# Altium PCB PCB1.PcbDoc
Units mil, origin at the board's own origin, x right, y up, seen from the top; angles counter-clockwise.
Board outline 1580 x 650 mil, 2 copper layers (Top Layer, Bottom Layer); 9 components, 3 nets, 33 pads, 0 vias.
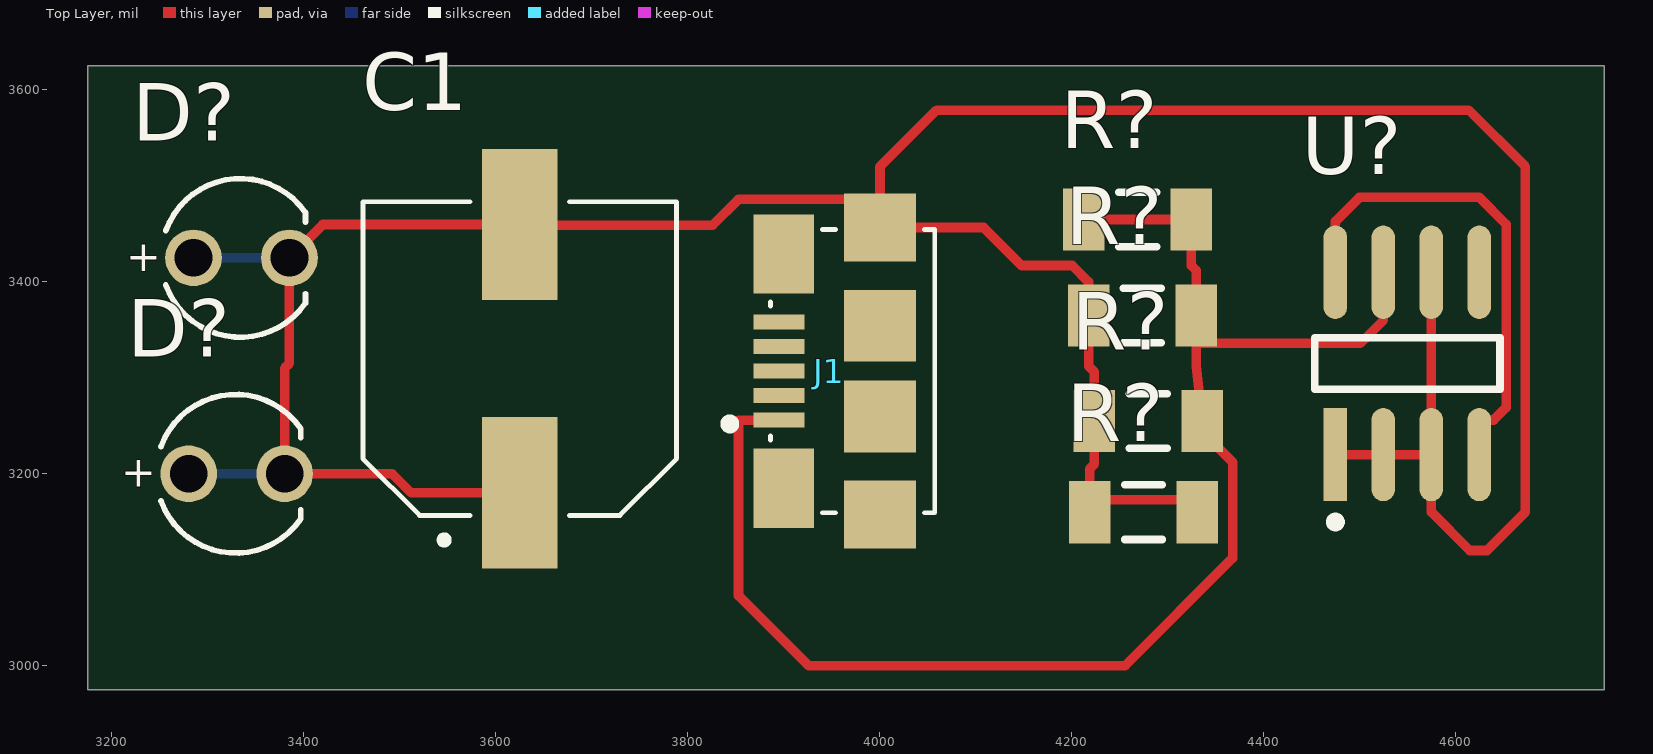
[diagram p0: Top Layer view]
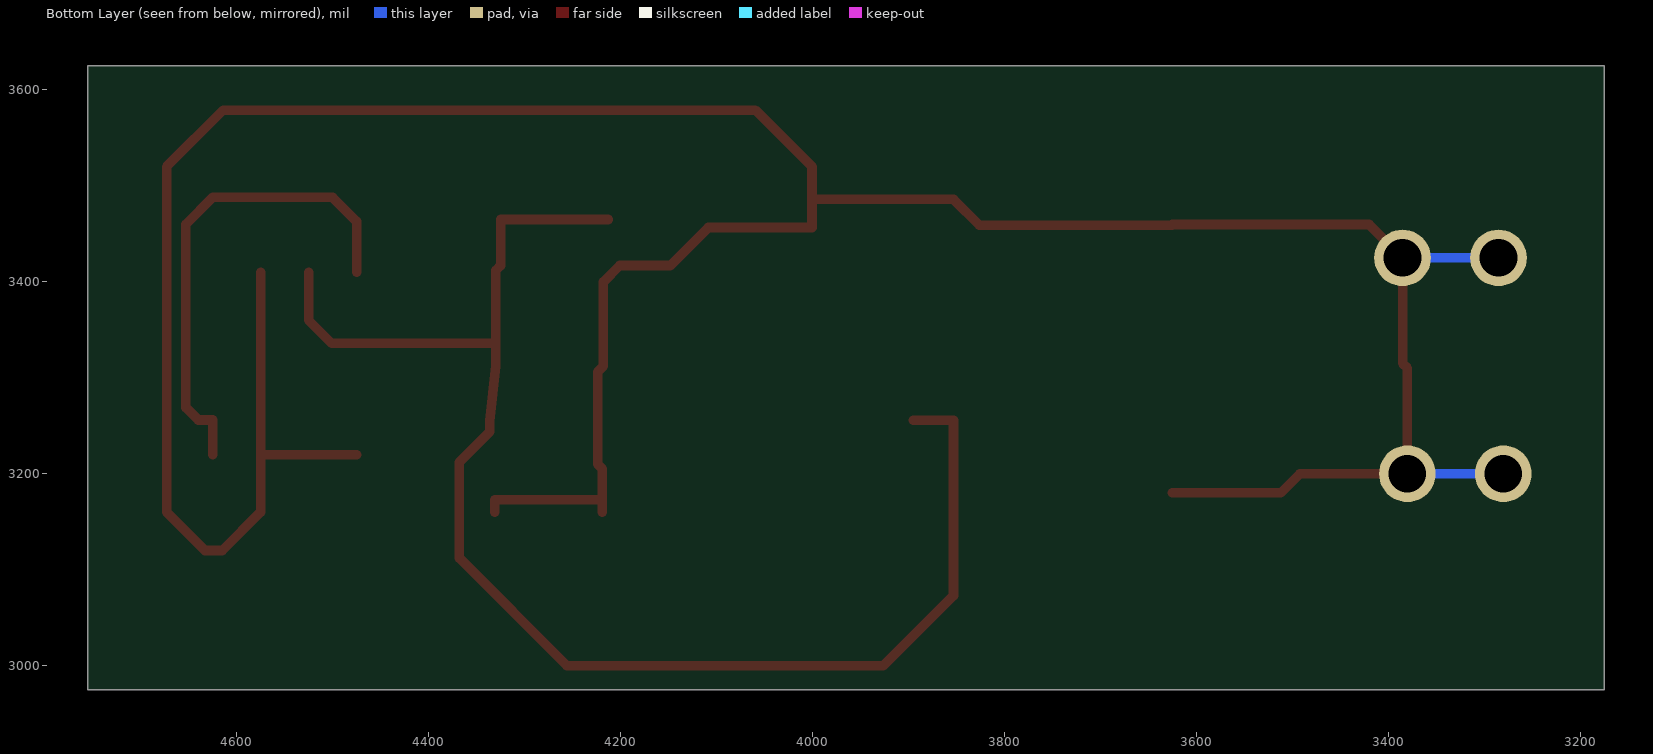
[diagram p1: Bottom Layer view, seen from below]
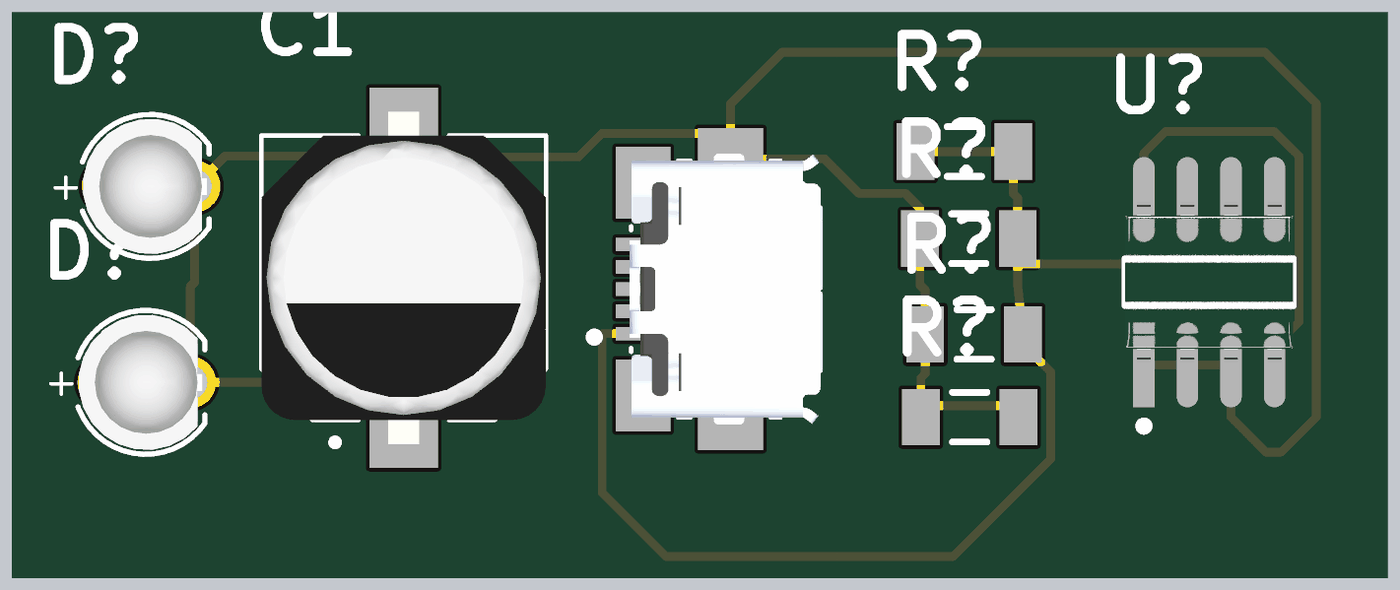
[diagram p2: 3D render of the assembled board from above, using the file's embedded part models]

## Layer stack, top to bottom
Top Solder: solder mask 0.4, Solder Resist, Dk 3.5
Top Layer: signal copper 1.4
Dielectric 1: dielectric 12.6, FR-4, Dk 4.8
Bottom Layer: signal copper 1.4
Bottom Solder: solder mask 0.4, Solder Resist, Dk 3.5

## Board outline
3175,2975 4755,2975 4755,3625 3175,3625

## Design rules (kind name [scope] priority, off if disabled: settings)
Clearance [All] p1: gap=10 ignorepadtopadclearanceinfootprint=FALSE
PolygonConnect [All] p1: connectstyle=Relief reliefconductorwidth=10 reliefentries=4 polygonreliefangle="90 Angle" airgapwidth=10
RoutingVias [All] p1: holewidth=28 width=50 viastyle="Through Hole" minholewidth=28 minwidth=50 maxholewidth=28 maxwidth=50
SolderMaskExpansion [All] p1: expansion=4 istentingtop=FALSE
SupplyNets "Schematic Supply Nets_1" [InNet('GND')] p1: voltage=0.000
SupplyNets "Schematic Supply Nets" [InNet('+5')] p2: voltage=0.000
Width [All] p1: maxlimit=10 minlimit=10 preferedwidth=10
30 further rules are at their usual default settings.

## Components (designator, comment, footprint, x,y, rotation, side; value= is the part's Value field where it differs from the comment)
C1 "EEEHA2A100P" CAP_EEEHA2A100P 3625,3320 r90 top
D? "Super Red, 2V, 40°" WL-TMRC_D3.95H5.3 3335,3425 r0 top
D? "Super Red, 2V, 40°" WL-TMRC_D3.95H5.3 3330,3200 r0 top
J1 "10118192-0001LF" AMPHENOL_10118192-0001LF 3895.08,3307.05 r90 top
R? "ERJ-8GEY0R00V" RESC3216X70X50NL05T20 4268.9,3465 r0 top
R? "ERJ-8GEY0R00V" RESC3216X70X50NL05T20 4275,3160 r0 top
R? "ERJ-8GEY0R00V" RESC3216X70X50NL05T20 4280,3255 r0 top
R? "ERJ-8GEY0R00V" RESC3216X70X50NL05T20 4273.9,3365 r0 top
U? "NE555DRG4" FP-D0008A-IPC_A 4550,3315 r90 top

## Footprints (in the part's own frame and the unit in brackets; to place one, negate y for a bottom-side part, rotate by r counter-clockwise, add the part's x,y. Pads: shape width x height; smd on the part's side, far side on the other; paste and mask are expansions set on the pad)
AMPHENOL_10118192-0001LF [mm]
  rect 0.4x1.35 smd: 1(-1.3,0) 2(-0.65,0) 3(0,0) 4(0.65,0) 5(1.3,0)
  rect 2.1x1.6 smd: SH1(-3.1,-0.125) SH2(3.1,-0.125)
  rect 1.8x1.9 smd: SH3(-3.8,-2.675) SH6(3.8,-2.675)
  rect 1.9x1.9 smd: SH4(-1.2,-2.675) SH5(1.2,-2.675)
  silkscreen extent -3.75,-4.12 3.75,1.4, body extent -3.96,-5.4 3.96,0.27, height 2.5
CAP_EEEHA2A100P [mm]
  rect 4x2 smd: 1(-3.55,0) 2(3.55,0)
  silkscreen extent -4.9,-4.15 4.15,4.15, body extent -4.85,-4.15 4.85,4.15, height 10.2
FP-D0008A-IPC_A [mil]
  rect 97.21x24.49 smd paste+0 mask+0: 1(-95.02,75)
  rrect100% 97.21x24.49 smd paste+0 mask+0: 2(-95.02,25) 3(-95.02,-25) 4(-95.02,-75) 5(95.02,-75) 6(95.02,-25) 7(95.02,25) 8(95.02,75)
  silkscreen extent -170,-97 27,97, body extent -163,-116 163,116, height 10
RESC3216X70X50NL05T20 [mm] "Chip Resistor, 2-Leads, Body 3.20x1.60mm, IPC Medium Density"
  rect 1.1x1.65 smd: 1(-1.425,0) 2(1.425,0)
  silkscreen extent -0.5,-0.73 0.5,0.73, body extent -1.63,-0.82 1.62,0.82, height 0.7
WL-TMRC_D3.95H5.3 [mm] "THT Mono-color Round Color LED, 2-leads"
  round 1.5 hole 1: 1(-1.27,0) 2(1.27,0)
  silkscreen extent -2,-2.1 1.69,2.1, body extent -1.99,-1.97 1.63,1.97, height 5.35

## Part data
C1: "10ÂµF 100V Aluminum Electrolytic Capacitors Radial, Can - SMD 1000 Hrs @ 105Â°C", Package="RADIAL-2 Panasonic", Availability="In Stock", Check_prices=https://www.snapeda.com/parts/EEE-HA2A100P/Panasonic+Electronic+Components/view-part/?ref=eda, MF="Panasonic Electronic", MP=EEE-HA2A100P, Price=None, Purchase-URL=https://pricing.snapeda.com/search/part/EEE-HA2A100P/?ref=eda, SnapEDA_Link=https://www.snapeda.com/parts/EEE-HA2A100P/Panasonic+Electronic+Components/view-part/?ref=snap
D? D?: library part 151031SS04000, "WL-TMRC Mono-color Round Color, THT, D3.95 x H5.3mm, Super Red, 2V, 40°", Case/Size Code=3mm, Emitting Color="Super Red", Forward Voltage=2V, Manufacturer="Wurth Elektronik", Operating Temperature Max=85°C, Operating Temperature Min=-40°C, Category="Signal LEDs", Chip Technology=AlInGaP, ComponentLink1Description="Website Link", ComponentLink1URL=https://www.we-online.com/redexpert/article/151031SS04000?ad, ComponentLink2Description="Datasheet Link", ComponentLink2URL=https://www.we-online.com/redexpert/spec/151031SS04000?ad, Diameter=3.95mm, Dominant Wavelength=635nm, Height=5.3mm, Luminous Intensity=160mcd, Manufacturer Part Number=151031SS04000, Match Code=WL-TMRC, Mount="Through Hole", Packaging=Bulk, Peak Wavelength=640nm, Viewing Angle=40°
J1: "Micro USB, Input Output Connectors, B TYPE RECEPTACLE with flange", Package=None, Availability="In Stock", Check_prices=https://www.snapeda.com/parts/10118192-0001LF/Amphenol+FCI/view-part/?ref=eda, MF="Amphenol ICC", MP=10118192-0001LF, Price=None, Purchase-URL=https://pricing.snapeda.com/search/part/10118192-0001LF/?ref=eda, SnapEDA_Link=https://www.snapeda.com/parts/10118192-0001LF/Amphenol+FCI/view-part/?ref=snap
R? R? R? R?: library part CMP-2003-00541-1, Manufacturer=Panasonic, Part Number=ERJ-8GEY0R00V
U?: library part CMP-04858-000027-1, "IC OSC SGL TIMER 100KHZ 8-SOIC", Case/Package=SOIC, Frequency=100kHz, High Level Output Current=-200mA, Low Level Output Current=200mA, Max Operating Temperature=70°C, Max Supply Voltage=16V, Min Operating Temperature=0°C, Min Supply Voltage=4.5V, Nominal Supply Current=2mA, Operating Supply Current=10mA, Package Quantity=2500, Quiescent Current=15mA, Height=1.58mm, Lead Free="Lead Free", Length=4.9mm, Mount="Surface Mount", Number of Pins=8, Number of Timers/Counters=1, Packaging="Tape and Reel", Radiation Hardening=No, RoHS Compliant=Yes, Series=-, Supply Current=2mA, Weight=0.002561oz, Width=3.91mm

## Nets (pads, with @x,y where several pads share a name; then routed paths per layer and width w, separated by ;. In a path a pad name is that pad's centre, name@x,y a point inside that pad or via, vN(x,y) a via of type N, cw(c..) or ccw(c..) an arc to the next point about the centre after c; other vN are vias at no path point)
+5: J1.1 R?.1@4212.8,3465 R?.2@4325,3465 R?.2@4330,3365 R?.2@4336.1,3255 U?.7 | length 1552.4
  Top Layer w10: J1.1 3853,3255.87 3853,3073 3926,3000 4256,3000 4368,3112 4368,3212.1 4336.1,3244 4336.1,3255 4330,3312.1 R?.2@4330,3336 ; R?.1@4212.8,3465 4325,3465 4325,3417 4330,3412 4330,3365 R?.2@4330,3336 ; U?.7 4525,3360 4501,3336 R?.2@4330,3336
GND: C1.1 C1.2 D?.1 D?.2 J1.SH6 R?.1@4217.8,3365 R?.1@4218.9,3160 R?.1@4223.9,3255 R?.2@4331.1,3160 U?.1 U?.2 U?.3 U?.6 | length 3558.7
  Top Layer w10: C1.1 3511.76,3180.24 3492,3200 3380,3200 3380,3310 3385,3315 3385,3425 3419.76,3459.76 C1.2 3625,3459 3826,3459 3853,3486 J1.SH6@4000.39,3486 ; R?.1@4218.9,3160 R?.1@4218.9,3173.04 ; R?.2@4331.1,3160 4331.1,3173.04 R?.1@4218.9,3173.04 ; U?.1 U?.2 U?.3 ; U?.6 U?.3 ; J1.SH6@4000.39,3486 4000.39,3520 4059.39,3579 4614,3579 4673,3520 4673,3160 4633,3120 4615,3120 4575,3160 U?.3 ; J1.SH6@4000.39,3486 J1.SH6 4108.35,3456.65 4148,3417 4200.8,3417 4217.8,3400 4217.8,3365 4217.8,3312.1 4223.9,3306 4223.9,3255 4223.9,3210 4218.9,3205 R?.1@4218.9,3173.04
  Bottom Layer w10: D?.1@3280,3200 D?.2@3380,3200 ; D?.1@3285,3425 D?.2@3385,3425
NetU?_4: U?.4 U?.8 | length 513.3
  Top Layer w10: U?.8 4475,3463 4500,3488 4625,3488 4653,3460 4653,3269 4640,3256 4625,3256 U?.4
pads on no net: J1.2 J1.3 J1.4 J1.5 J1.SH1 J1.SH2 J1.SH3 J1.SH4 J1.SH5 U?.5

## Text inside footprints (layer, text, board x,y; h text height)
D?: Top Overlay "+" at 3209.92,3186.22 h31.5
D?: Top Overlay "+" at 3214.92,3411.22 h31.5
J1: Mechanical 13 "PCB Edge" at 4048.77,3511.97 h32.03 r90